# Altium PCB monitor.PcbDoc
Units mm, origin at the board's own origin, x right, y up, seen from the top; angles counter-clockwise.
Board outline 68.83 x 88.9 mm, 2 copper layers (Top Layer, Bottom Layer); 62 components, 47 nets, 260 pads, 53 vias.
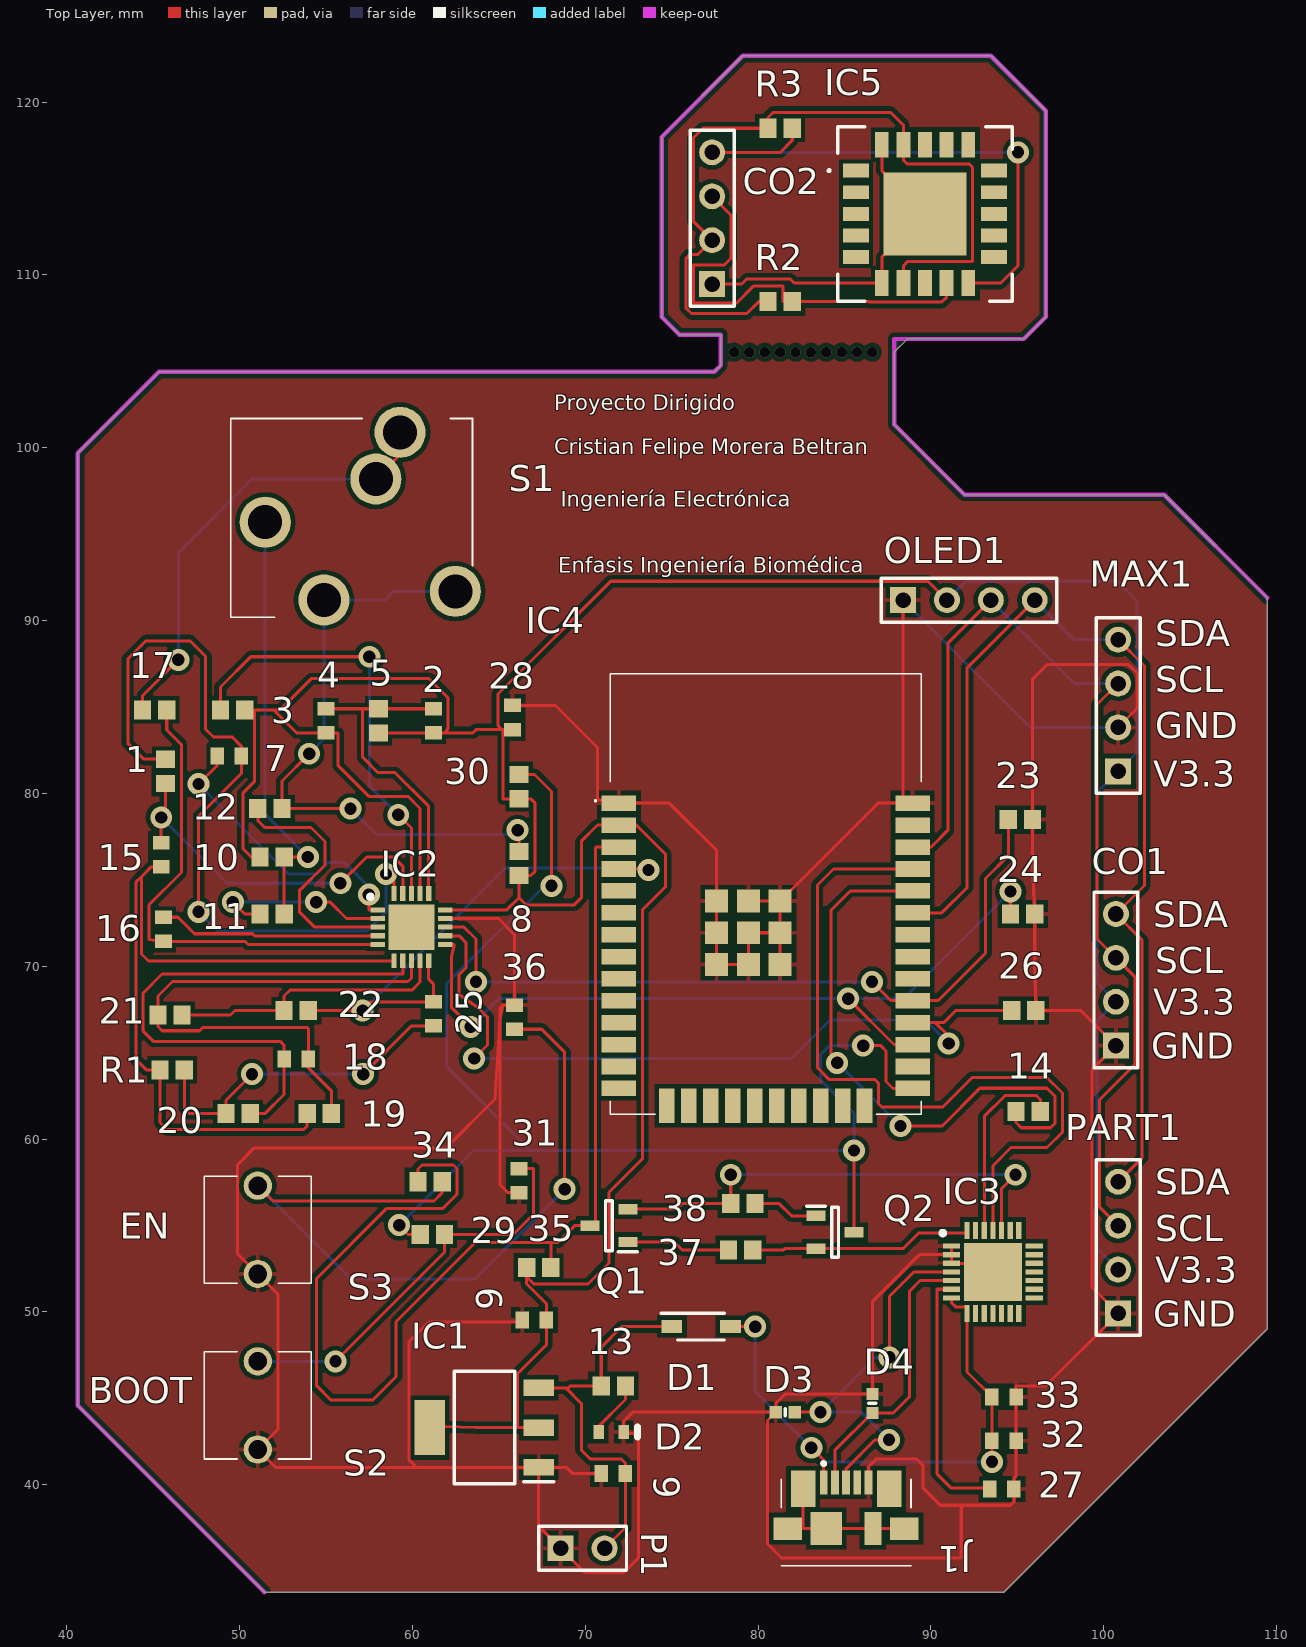
[diagram p0: Top Layer view]
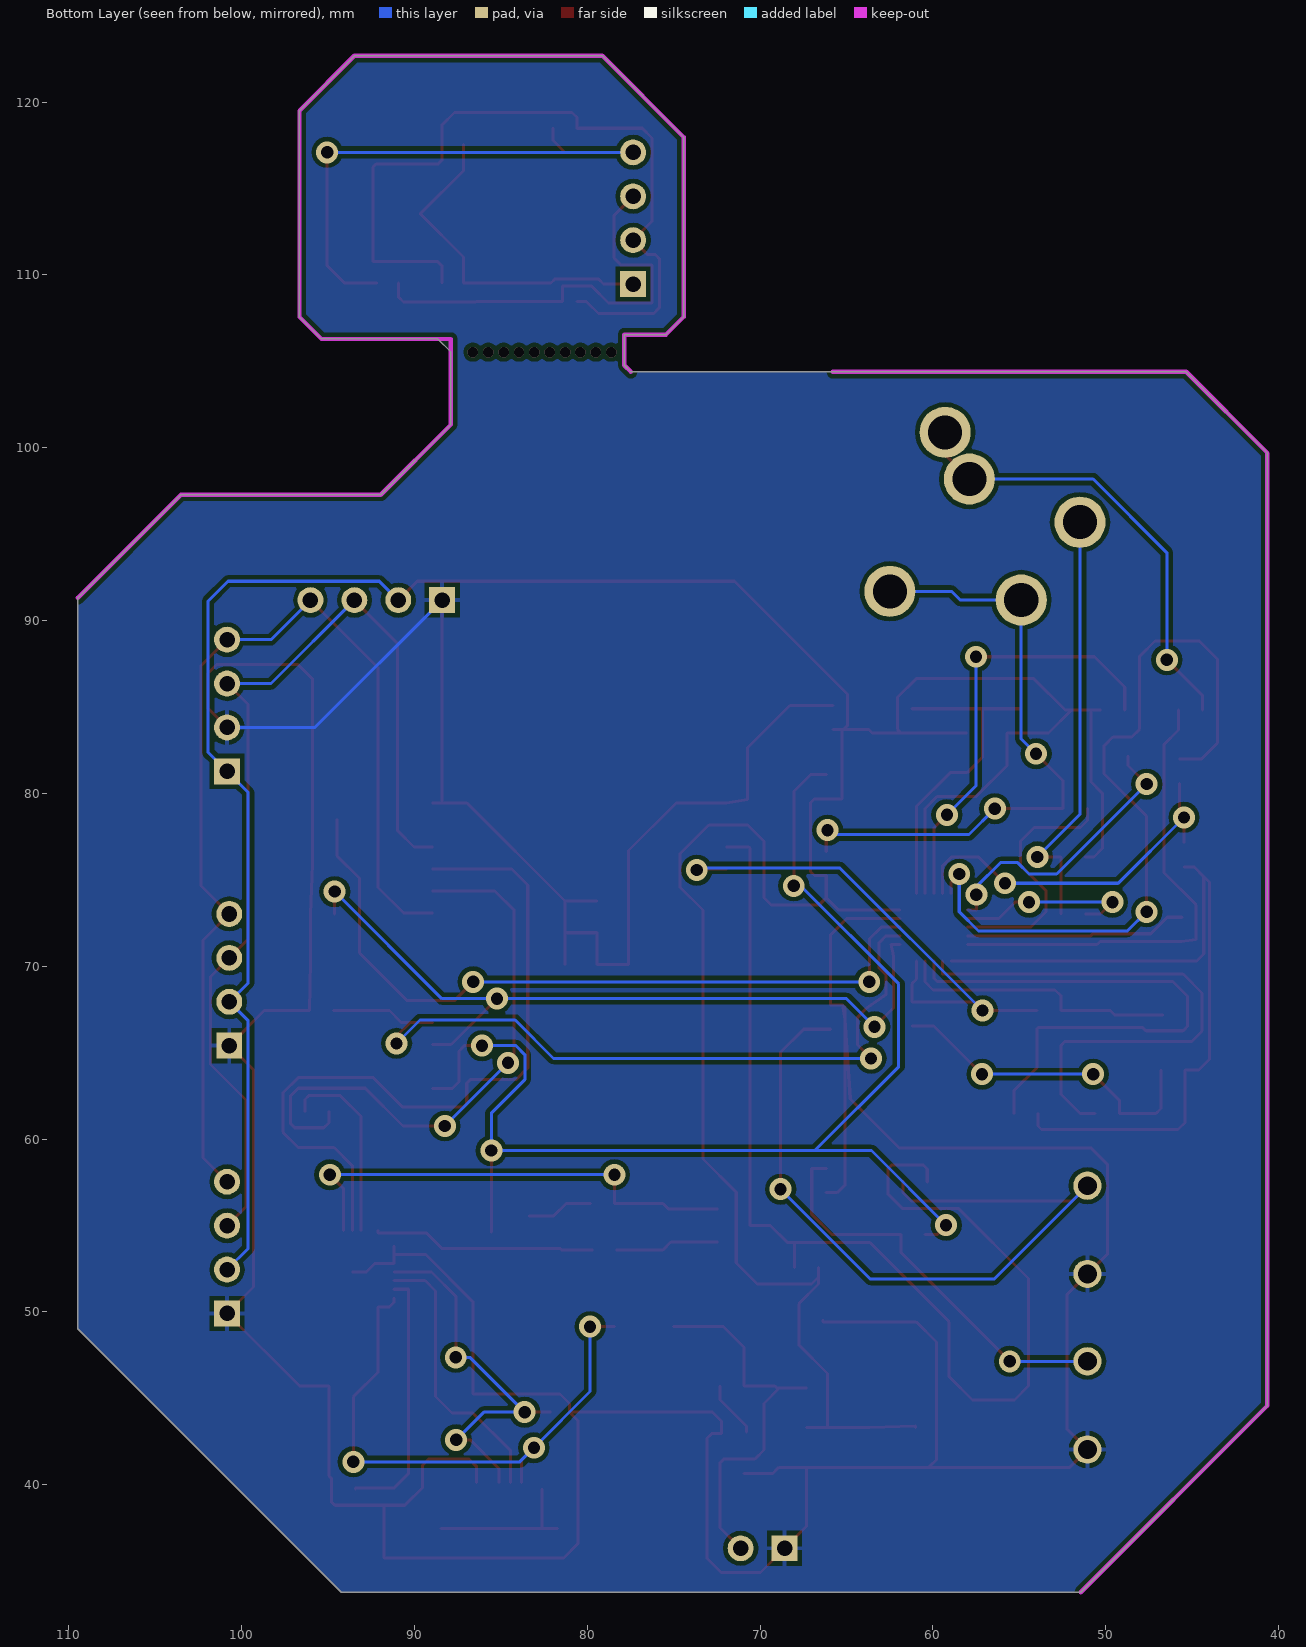
[diagram p1: Bottom Layer view, seen from below]

## Layer stack, top to bottom
Top Solder: solder mask 0.0102, Solder Resist, Dk 3.5
Top Layer: signal copper 0.0356
Dielectric 1: dielectric 0.32, FR-4, Dk 4.8
Bottom Layer: signal copper 0.0356
Bottom Solder: solder mask 0.0102, Solder Resist, Dk 3.5

## Board outline
40.64,44.577 51.435,33.782 94.234,33.782 109.474,49.022 109.474,91.313 103.505,97.282 91.948,97.282 87.884,101.346 87.884,105.537 88.646,106.299 95.377,106.299 96.647,107.569 96.647,119.507 93.472,122.682 79.121,122.682 74.422,117.983 74.422,107.569 75.438,106.553 77.851,106.553 77.851,104.775 77.47,104.394 45.339,104.394 40.64,99.695

## Design rules (kind name [scope] priority, off if disabled: settings)
Clearance [All] p1: gap=0.254 ignorepadtopadclearanceinfootprint=FALSE except(0: Arc-Hole Track-Hole SMDPad-Hole THPad-Hole Via-Hole Fill-Hole Poly-Hole Region-Hole Text-Hole)
PolygonConnect [All] p1: connectstyle=Relief reliefconductorwidth=0.254 reliefentries=4 polygonreliefangle="90 Angle" airgapwidth=0.254
RoutingVias [All] p1: holewidth=0.711 width=1.27 viastyle="Through Hole" minholewidth=0.711 minwidth=1.27 maxholewidth=0.711 maxwidth=1.27
SolderMaskExpansion [All] p1: expansion=0.102 istentingtop=FALSE
Width [All] p1: maxlimit=0.2 minlimit=0.15 preferedwidth=0.175 minimp=50.000000 maximp=50.000000 favimp=50.000000
30 further rules are at their usual default settings.

## Classes and differential pairs
component class micro: 37 38 CO2 IC5
component class alimentacion: 0 1 2 3 4 5 6 7 8 9 10 11 12 13 15 16 17 18 19 20 21 22 23 24 25 26 27 28 29 30 31 32 33 34 35 36 37 38 CO1 D1 D2 D3 D4 IC1 IC2 IC3 IC4 J1 MAX1 OLED1 P1 PART1 Q1 Q2 R1 S1 S2 S3

## Components (designator, comment, footprint, x,y, rotation, side; value= is the part's Value field where it differs from the comment)
1 "ERA3AEB1131V" RESC1608X55X30ML20T20 45.72,81.28 r90 top
2 "C0603C103J5RAC" CAPC1608X87N 61.214,84.201 r90 top
3 "ERA3AEB1131V" RESC1608X55X30ML20T20 49.595,84.836 r180 top
4 "C0603C103J5RAC" CAPC1608X87N 54.991,84.201 r90 top
5 "ERA3AEB1131V" RESC1608X55X30ML20T20 58.039,84.201 r90 top
6 "C0603C103J5RAC" CAPC1608X87N 67.056,49.53 r0 top
7 "C0603C103J5RAC" CAPC1608X87N 49.403,82.169 r180 top
8 "ERA3AEB1131V" RESC1608X55X30ML20T20 66.167,75.946 r90 top
9 "C0603C103J5RAC" CAPC1608X87N 71.628,40.64 r0 top
10 "ERA3AEB1131V" RESC1608X55X30ML20T20 51.881,76.327 r0 top
11 "ERA3AEB1131V" RESC1608X55X30ML20T20 51.878,73.025 r0 top
12 "ERA3AEB1131V" RESC1608X55X30ML20T20 51.754,79.121 r0 top
13 "ERA3AEB1131V" RESC1608X55X30ML20T20 71.628,45.72 r180 top
14 "ERA3AEB1131V" RESC1608X55X30ML20T20 95.631,61.595 r0 top
15 "C0603C103J5RAC" CAPC1608X87N 45.466,76.454 r270 top
16 "C0603C103J5RAC" CAPC1608X87N 45.593,72.136 r270 top
17 "ERA3AEB1131V" RESC1608X55X30ML20T20 45.085,84.836 r0 top
18 "C0603C103J5RAC" CAPC1608X87N 53.275,64.643 r0 top
19 "ERA3AEB1131V" RESC1608X55X30ML20T20 54.61,61.468 r0 top
20 "ERA3AEB1131V" RESC1608X55X30ML20T20 49.911,61.468 r180 top
21 "ERA3AEB1131V" RESC1608X55X30ML20T20 45.974,67.183 r0 top
22 "ERA3AEB1131V" RESC1608X55X30ML20T20 53.275,67.437 r180 top
23 "ERA3AEB1131V" RESC1608X55X30ML20T20 95.185,78.486 r0 top
24 "ERA3AEB1131V" RESC1608X55X30ML20T20 95.312,73.025 r0 top
25 "C0603C103J5RAC" CAPC1608X87N 61.214,67.245 r90 top
26 "ERA3AEB1131V" RESC1608X55X30ML20T20 95.377,67.437 r0 top
27 "C0603C103J5RAC" CAPC1608X87N 94.107,39.751 r0 top
28 "C0603C103J5RAC" CAPC1608X87N 65.786,84.393 r270 top
29 "ERA3AEB1131V" RESC1608X55X30ML20T20 61.152,54.483 r0 top
30 "ERA3AEB1131V" RESC1608X55X30ML20T20 66.167,80.391 r90 top
31 "C0603C103J5RAC" CAPC1608X87N 66.167,57.596 r270 top
32 "C0603C103J5RAC" CAPC1608X87N 94.234,42.545 r0 top
33 "C0603C103J5RAC" CAPC1608X87N 94.234,45.085 r0 top
34 "ERA3AEB1131V" RESC1608X55X30ML20T20 61.022,57.531 r0 top
35 "ERA3AEB1131V" RESC1608X55X30ML20T20 67.31,52.578 r0 top
36 "C0603C103J5RAC" CAPC1608X87N 65.913,67.056 r90 top
37 "ERA3AEB1131V" RESC1608X55X30ML20T20 78.994,53.594 r0 top
38 "ERA3AEB1131V" RESC1608X55X30ML20T20 79.121,56.261 r0 top
CO1 "Header 4" HDR1X4 100.711,65.405 r90 top
CO2 "Header 4" HDR1X4 77.343,109.474 r90 top
D1 "1N5819HWQ-7-F" SOD3716X145N 76.708,49.149 r0 top
D2 "TLMB1100-GS08" VISH-TLMX1100-2_V 71.501,43.053 r0 top
D3 "GG0402050R3C2P" DIONC1006X55N 81.576,44.196 r0 top
D4 "GG0402050R3C2P" DIONC1006X55N 86.614,44.704 r270 top
IC1 "AZ1117IH-3.3TRG1" SOT230P700X180-4N 64.16,43.307 r180 top
IC2 "AD8232ACPZ-WP" QFN50P400X400X80-21N-D 59.944,72.263 r0 top
IC3 "CP2102-GMR" QFN50P500X500X100-29N-D 93.591,52.311 r0 top
IC4 "ESP32-WROOM-32_M103QH2800PH3Q0_" ESP32WROOM32M103QH2800PH3Q0 80.445,74.179 r0 top
IC5 "SCD41-D-R2" SCD41DR2 89.662,113.538 r0 top
J1 "47346-1001" 473461001 85.097,38.221 r0 top
MAX1 "Header 4" HDR1X4 100.838,81.28 r90 top
OLED1 "Header 4" HDR1X4 88.392,91.186 r0 top
P1 "Header 2" HDR1X2 68.58,36.322 r0 top
PART1 "Header 4" HDR1X4 100.838,49.911 r90 top
Q1 "SS8050-G" SOT95P240X115-3N 71.374,54.991 r180 top
Q2 "SS8050-G" SOT95P240X115-3N 84.455,54.61 r0 top
R1 "ERA3AEB1131V" RESC1608X55X30ML20T20 46.101,64.008 r0 top
R2 "ERA3AEB1131V" RESC1608X55X30ML20T20 81.28,108.458 r0 top
R3 "ERA3AEB1131V" RESC1608X55X30ML20T20 81.28,118.491 r0 top
S1 "35RAPC4BH3" 35RAPC4BH3 51.484,95.694 r0 top
S2 "FSM2JRT" FSM2JRT 51.054,42.037 r0 top
S3 "FSM2JRT" FSM2JRT 51.054,52.197 r0 top

## Footprints (in the part's own frame and the unit in brackets; to place one, negate y for a bottom-side part, rotate by r counter-clockwise, add the part's x,y. Pads: shape width x height; smd on the part's side, far side on the other; paste and mask are expansions set on the pad)
35RAPC4BH3 [mm]
  round 2.955 hole 1.97: 1(0,0) 2(7.8,5.2) 3(6.4,2.5) 4(11,-4) 5(3.4,-4.5)
  silkscreen extent -2,-5.5 12,6, body extent -5.34,-5.55 12.16,5.95, height 6.1
473461001 [mm]
  rect 0.45x1.38 smd: 1(-1.3,1.903) 2(-0.65,1.903) 3(0,1.903) 4(0.65,1.903) 5(1.3,1.903)
  rect 1.425x2.1 smd: 6(2.487,1.544) 7(-2.487,1.544)
  rect 1.8x1.9 smd: 8(-1.15,-0.756)
  rect 1x1.9 smd: 9(1.55,-0.756)
  rect 1.65x1.3 smd: 10(-3.375,-0.756) 11(3.375,-0.756)
  silkscreen extent -3.75,-2.91 3.75,3.1, body extent -3.9,-2.85 3.9,2.15, height 2.72
CAPC1608X87N [mm]
  rect 0.78x0.98 smd: 1(-0.7,0) 2(0.7,0)
  body extent -0.87,-0.48 0.88,0.47, height 0.87
DIONC1006X55N [mm]
  rect 0.7x0.7 smd: 1(-0.55,0) 2(0.55,0)
  silkscreen extent 0,-0.2 0,0.2, body extent -0.5,-0.3 0.5,0.3, height 0.55
ESP32WROOM32M103QH2800PH3Q0 [mm]
  rect 2x0.9 smd: 1(-8.5,5.26) 2(-8.5,3.99) 3(-8.5,2.72) 4(-8.5,1.45) 5(-8.5,0.18) 6(-8.5,-1.09) 7(-8.5,-2.36) 8(-8.5,-3.63) 9(-8.5,-4.9) 10(-8.5,-6.17) 11(-8.5,-7.44) 12(-8.5,-8.71) 13(-8.5,-9.98) 14(-8.5,-11.25) 25(8.5,-11.25) 26(8.5,-9.98) 27(8.5,-8.71) 28(8.5,-7.44) 29(8.5,-6.17) 30(8.5,-4.9) 31(8.5,-3.63) 32(8.5,-2.36) 33(8.5,-1.09) 34(8.5,0.18) 35(8.5,1.45) 36(8.5,2.72) 37(8.5,3.99) 38(8.5,5.26)
  rect 0.9x2 smd: 15(-5.715,-12.25) 16(-4.445,-12.25) 17(-3.175,-12.25) 18(-1.905,-12.25) 19(-0.635,-12.25) 20(0.635,-12.25) 21(1.905,-12.25) 22(3.175,-12.25) 23(4.445,-12.25) 24(5.715,-12.25)
  rect 1.33x1.33 smd: 39(-1,-2.24) 40(-2.835,-4.075) 41(-1,-4.075) 42(0.835,-4.075) 43(0.835,-2.24) 44(0.835,-0.405) 45(-1,-0.405) 46(-2.835,-0.405) 47(-2.835,-2.24)
  silkscreen extent -9.9,-12.75 9,12.75, body extent -9,-12.75 9,12.75, height 3.1
FSM2JRT [mm]
  round 1.638 hole 1.092: 1(0,0) 2(0,5.105)
  silkscreen extent -3.1,-0.55 3.1,5.65, body extent -3.1,-0.55 3.1,5.65, height 4.3
HDR1X2 [mm] "Connector; Header; 2 Position"
  rect 1.5x1.5 hole 0.9: 1(0,0)
  round 1.5 hole 0.9: 2(2.54,0)
  silkscreen extent -1.27,-1.27 3.81,1.27
HDR1X4 [mm] "Connector; Header; 4 Position"
  rect 1.5x1.5 hole 0.9: 1(0,0)
  round 1.5 hole 0.9: 2(2.54,0) 3(5.08,0) 4(7.62,0)
  silkscreen extent -1.27,-1.27 8.89,1.27
QFN50P400X400X80-21N-D [mm]
  rect 0.85x0.3 smd: 1(-1.95,1) 2(-1.95,0.5) 3(-1.95,0) 4(-1.95,-0.5) 5(-1.95,-1) 11(1.95,-1) 12(1.95,-0.5) 13(1.95,0) 14(1.95,0.5) 15(1.95,1)
  rect 0.3x0.85 smd: 6(-1,-1.95) 7(-0.5,-1.95) 8(0,-1.95) 9(0.5,-1.95) 10(1,-1.95) 16(1,1.95) 17(0.5,1.95) 18(0,1.95) 19(-0.5,1.95) 20(-1,1.95)
  rect 2.65x2.65 smd: 21(0,0)
  silkscreen extent -2.5,1.63 -2.25,1.87, body extent -2.05,-2.05 2.05,2.05, height 0.8
QFN50P500X500X100-29N-D [mm]
  rect 1x0.3 smd: 1(-2.4,1.5) 2(-2.4,1) 3(-2.4,0.5) 4(-2.4,0) 5(-2.4,-0.5) 6(-2.4,-1) 7(-2.4,-1.5) 15(2.4,-1.5) 16(2.4,-1) 17(2.4,-0.5) 18(2.4,0) 19(2.4,0.5) 20(2.4,1) 21(2.4,1.5)
  rect 0.3x1 smd: 8(-1.5,-2.4) 9(-1,-2.4) 10(-0.5,-2.4) 11(0,-2.4) 12(0.5,-2.4) 13(1,-2.4) 14(1.5,-2.4) 22(1.5,2.4) 23(1,2.4) 24(0.5,2.4) 25(0,2.4) 26(-0.5,2.4) 27(-1,2.4) 28(-1.5,2.4)
  rect 3.35x3.35 smd: 29(0,0)
  silkscreen extent -3.02,2.13 -2.77,2.37, body extent -2.55,-2.55 2.55,2.55, height 1
RESC1608X55X30ML20T20 [mm] "Chip Resistor, 2-Leads, Body 1.60x0.80mm, IPC Low Density"
  rect 1x1.1 smd: 1(-0.7,0) 2(0.7,0)
  body extent -0.9,-0.5 0.9,0.5, height 0.55
SCD41DR2 [mm]
  rect 1.5x0.8 smd: 1(-4,2.5) 2(-4,1.25) 3(-4,0) 4(-4,-1.25) 5(-4,-2.5) 11(4,-2.5) 12(4,-1.25) 13(4,0) 14(4,1.25) 15(4,2.5)
  rect 0.8x1.5 smd: 6(-2.5,-4) 7(-1.25,-4) 8(0,-4) 9(1.25,-4) 10(2.5,-4) 16(2.5,4) 17(1.25,4) 18(0,4) 19(-1.25,4) 20(-2.5,4)
  rect 4.8x4.8 smd: 21(0,0)
  silkscreen extent -5.6,-5.05 5.05,5.05, body extent -5.05,-5.05 5.05,5.05, height 6.31
SOD3716X145N [mm]
  rect 1.2x0.75 smd: 1(-1.7,0) 2(1.7,0)
  silkscreen extent -2.3,-0.78 1.35,0.78, body extent -1.85,-0.77 1.85,0.77, height 1.45
SOT95P240X115-3N [mm]
  rect 1.1x0.6 smd: 1(-1.1,0.95) 2(-1.1,-0.95) 3(1.1,0)
  silkscreen extent -1.65,-1.45 0.2,1.5, body extent -1.2,-1.45 1.2,1.45, height 1.15
SOT230P700X180-4N [mm]
  rect 1.75x0.95 smd: 1(-3.15,2.3) 2(-3.15,0) 3(-3.15,-2.3)
  rect 1.75x3.2 smd: 4(3.15,0)
  silkscreen extent -4.02,-3.25 1.75,3.25, body extent -3.5,-3.25 3.5,3.25, height 1.68
VISH-TLMX1100-2_V [mm] "SMD, 2-Leads, Body 1.6x0.8mm"
  rect 0.6x0.8 smd: 1(-0.725,0) 2(0.725,0)
  silkscreen extent 1.53,-0.3 1.53,0.3, body extent -0.8,-0.4 0.8,0.4, height 0.65

## Part data
1 3 5 8 10 11 12 13 14 17 19 20 21 22 23 24 26 29 30 34 35 37 38 R1 R2 R3: library part CMP-2000-00883-1, Manufacturer=Panasonic, Part Number=ERA3AEB1131V
2 4 6 7 9 15 16 18 25 27 28 31 32 33 36: "Capacitor", Manufacturer_Name=KEMET, Mouser Part Number=80-C0603C103J5RAC, Arrow Part Number=C0603C103J5RAC, Arrow Price/Stock=https://www.arrow.com/en/products/c0603c103j5rac/kemet-corporation?region=nac, Datasheet Link=https://www.kemet.com/specsheet/C0603C103J5RAC%7BBULK%7D, Height=0.87mm, Manufacturer_Part_Number=C0603C103J5RAC, Mouser Price/Stock=https://www.mouser.co.uk/ProductDetail/KEMET/C0603C103J5RAC?qs=Zjfhvh7dXTOjKlZBdCXdvg%3D%3D
CO1 CO2 MAX1 OLED1 PART1: "Header, 4-Pin", LatestRevisionDate=17-Jul-2002, LatestRevisionNote="Re-released for DXP Platform.", Publisher="Altium Limited"
D1: "Schottky Diode", Manufacturer_Name="Diodes Inc.", Mouser Part Number=621-1N5819HWQ-7-F, Arrow Part Number=1N5819HWQ-7-F, Arrow Price/Stock=https://www.arrow.com/en/products/1n5819hwq-7-f/diodes-incorporated?region=nac, Datasheet Link=https://eu.mouser.com/datasheet/2/115/ds30217-1532212.pdf, Height=1.45mm, Manufacturer_Part_Number=1N5819HWQ-7-F, Mouser Price/Stock=https://www.mouser.co.uk/ProductDetail/Diodes-Incorporated/1N5819HWQ-7-F?qs=gZXFycFWdAPDr8BmsK1ygg%3D%3D
D2: library part CMP-1666-00028-1, "Blue LED, 10 mA, 3.9 V, -40 to 100 degC, 2-Pin SMD (0603), RoHS, Tape and Reel", Capacitance="10 nF", Case\Package=Radial, Max Operating Temperature="125 degC", Min Operating Temperature="-55 degC", Package Quantity=500, Tolerance=10%, Type (Capacitors)=X7R, Voltage Rating="100 V", ComponentLink1Description="Manufacturer URL", ComponentLink1URL=http://www.vishay.com/, ComponentLink2Description=Datasheet, ComponentLink2URL=http://download.siliconexpert.com/pdfs/2016/8/7/12/43/26/667/vsh_/manual/379263299541529tlmb1100.pdf, DatasheetVersion="Rev. 2.7, 03/2016", Height="2.54 mm", Lead Pitch="2.54 mm", Length="5.33 mm", Mount="Through Hole", PackageDescription="2-Pin Surface Mount Device, Body 1.6 x 0.8 mm", PackageReference=0603, Packaging=Bulk, Pins=2, Radiation Hardening=No, REACH SVHC="No SVHC", RoHSCompliant=true, Width="3.81 mm"
D3 D4: "TVS Diode (Bi-directional)", Manufacturer_Name=AVX, Mouser Part Number=581-GG0402050R3C2P, Arrow Part Number=GG0402050R3C2P, Arrow Price/Stock=https://www.arrow.com/en/products/gg0402050r3c2p/avx, Datasheet Link=https://mouser.componentsearchengine.com/Datasheets/1/GG0402050R3C2P.pdf, Height=0.55mm, Manufacturer_Part_Number=GG0402050R3C2P, Mouser Price/Stock=https://www.mouser.co.uk/ProductDetail/AVX/GG0402050R3C2P?qs=AQlKX63v8RvR10PwGJX5PQ%3D%3D
IC1: "Integrated Circuit", Manufacturer_Name="Diodes Inc.", Mouser Part Number=621-AZ1117IH-3.3TRG1, Arrow Part Number=AZ1117IH-3.3TRG1, Arrow Price/Stock=https://www.arrow.com/en/products/az1117ih-3.3trg1/diodes-incorporated?region=nac, Datasheet Link=http://www.mouser.com/ds/2/115/AZ1117-776390.pdf, Height=1.8mm, Manufacturer_Part_Number=AZ1117IH-3.3TRG1, Mouser Price/Stock=https://www.mouser.co.uk/ProductDetail/Diodes-Incorporated/AZ1117IH-3.3TRG1?qs=cpo3%2FpBou2jnS4SxLgAVoA%3D%3D
IC2: "Integrated Circuit", Manufacturer_Name="Analog Devices", Mouser Part Number=584-AD8232ACPZ-WP, Arrow Part Number=AD8232ACPZ-WP, Arrow Price/Stock=https://www.arrow.com/en/products/ad8232acpz-wp/analog-devices?region=nac, Datasheet Link=https://datasheet.datasheetarchive.com/originals/distributors/Datasheets-SFU1/DSASFU10003822.pdf, Height=0.8mm, Manufacturer_Part_Number=AD8232ACPZ-WP, Mouser Price/Stock=https://www.mouser.co.uk/ProductDetail/Analog-Devices/AD8232ACPZ-WP?qs=%2FtpEQrCGXCzCRiJ%252BumD7TQ%3D%3D
IC3: "Integrated Circuit", Manufacturer_Name="Silicon Labs", Mouser Part Number=634-CP2102-GMR, Arrow Part Number=CP2102-GMR, Arrow Price/Stock=https://www.arrow.com/en/products/cp2102-gmr/silicon-labs?region=nac, Datasheet Link=https://www.silabs.com/Support%20Documents/TechnicalDocs/CP2102-9.pdf, Height=1mm, Manufacturer_Part_Number=CP2102-GMR, Mouser Price/Stock=https://www.mouser.co.uk/ProductDetail/Silicon-Labs/CP2102-GMR?qs=cNyzPCcHMUWu%2FiPhR8KQAw%3D%3D
IC4: "Integrated Circuit", Manufacturer_Name="Espressif Systems", Manufacturer_Part_Number=ESP32-WROOM-32(M103QH2800PH3Q0), Mouser Part Number=356-ESPWROOM3216MB, Datasheet Link=https://th.mouser.com/datasheet/2/891/esp32-wroom-32_datasheet_en-1510934.pdf, Height=3.2mm, Mouser Price/Stock=https://www.mouser.co.uk/ProductDetail/Espressif-Systems/ESP32-WROOM-32M103QH2800PH3Q0?qs=W%2FMpXkg%252BdQ7IcgHFTTq3Ig%3D%3D
IC5: "Integrated Circuit", Manufacturer_Name=Sensirion, Mouser Part Number=403-SCD41-D-R2, Arrow Part Number=SCD41-D-R2, Arrow Price/Stock=https://www.arrow.com/en/products/scd41-d-r2/sensirion-ag?region=nac, Datasheet Link=https://cz.mouser.com/datasheet/2/682/Sensirion_CO2_Sensors_SCD4x_Datasheet-2010009.pdf, Height=6.8mm, Manufacturer_Part_Number=SCD41-D-R2, Mouser Price/Stock=https://www.mouser.co.uk/ProductDetail/Sensirion/SCD41-D-R2?qs=HBWAp0VN4Ri4o7ei4T3s0g%3D%3D
J1: "Connector", Manufacturer_Name=Molex, Mouser Part Number=538-47346-1001, Arrow Part Number=47346-1001, Arrow Price/Stock=https://www.arrow.com/en/products/47346-1001/molex?region=nac, Datasheet Link=http://www.molex.com/webdocs/datasheets/pdf/en-us/0473461001_IO_CONNECTORS.pdf, Height=2.94mm, Manufacturer_Part_Number=47346-1001, Mouser Price/Stock=https://www.mouser.co.uk/ProductDetail/Molex/47346-1001?qs=yd8XiKYcH9muPqUKe4E0Dw%3D%3D
P1: "Header, 2-Pin", LatestRevisionDate=17-Jul-2002, LatestRevisionNote="Re-released for DXP Platform.", Publisher="Altium Limited"
Q1 Q2: "Transistor BJT NPN", Manufacturer_Name="Comchip Technology", Mouser Part Number=750-SS8050-G, Arrow Part Number=SS8050-G, Arrow Price/Stock=https://www.arrow.com/en/products/ss8050-g/comchip-technology?region=nac, Datasheet Link=https://datasheet.datasheetarchive.com/originals/distributors/DKDS-12/229454.pdf, Height=1.15mm, Manufacturer_Part_Number=SS8050-G, Mouser Price/Stock=https://www.mouser.co.uk/ProductDetail/Comchip-Technology/SS8050-G?qs=LLUE9lz1YbcHg%252BWLMAtcrQ%3D%3D
S1: "Switch", Manufacturer_Name=Switchcraft, Mouser Part Number=502-35RAPC4BH3, Arrow Part Number=35RAPC4BH3, Arrow Price/Stock=https://www.arrow.com/en/products/35rapc4bh3/switchcraft, Datasheet Link=http://www.switchcraft.com/Drawings/35rapc__h3_cd.pdf, Height=6mm, Manufacturer_Part_Number=35RAPC4BH3, Mouser Price/Stock=https://www.mouser.co.uk/ProductDetail/Switchcraft/35RAPC4BH3?qs=I3kMT7EEIOWFGyk5rynRAQ%3D%3D
S2 S3: "Switch (2-Pin Push)", Manufacturer_Name="TE Connectivity", Mouser Part Number=506-FSM2JRT, Arrow Part Number=FSM2JRT, Arrow Price/Stock=https://www.arrow.com/en/products/fsm2jrt/te-connectivity?region=nac, Datasheet Link=http://www.farnell.com/datasheets/2074947.pdf, Height=4.3mm, Manufacturer_Part_Number=FSM2JRT, Mouser Price/Stock=https://www.mouser.co.uk/ProductDetail/TE-Connectivity-PB/FSM2JRT?qs=g%252BEszo6zu8OVk6hda53nSw%3D%3D

## Via types
v1: diameter 1.27, hole 0.711, Top Layer to Bottom Layer, 43 vias
v2: diameter 0.6, hole 0.6, Top Layer to Bottom Layer, 10 vias

## Nets (pads, with @x,y where several pads share a name; then routed paths per layer and width w, separated by ;. In a path a pad name is that pad's centre, name@x,y a point inside that pad or via, vN(x,y) a via of type N, cw(c..) or ccw(c..) an arc to the next point about the centre after c; other vN are vias at no path point)
DTR: 37.2 IC3.28 Q2.2 | length 12.9
  Top Layer w0.175: 37.2 81.483,53.594 81.549,53.66 Q2.2 88.392,53.66 89.291,54.559 92.091,54.559 IC3.28
EN: 34.1 35.2 IC4.3 Q1.3 | length 68.2
  Top Layer w0.175: 34.1 60.322,58.265 60.554,58.496 62.382,58.496 62.586,58.293 62.586,56.806 61.773,55.993 58.522,55.993 54.458,51.929 54.458,45.72 55.27,44.907 57.709,44.907 59.055,46.253 59.055,49.428 63.652,54.026 68.01,54.026 ; 35.2 68.01,54.026 ; IC4.3 70.636,76.899 70.587,76.85 70.587,54.991 Q1.3 69.393,54.991 68.428,54.026 68.01,54.026
Gnd: 6.1 9.1 23.2 24.2 26.2 27.2 28.1 31.2 32.2 33.2 36.2 CO1.1 D2.2 D3.1 D4.1 IC1.1 IC2.14 IC3.1 IC3.2 IC3.3 IC3.29 IC4.1 IC4.38 IC4.39 IC4.40 IC4.41 IC4.42 IC4.43 IC4.44 IC4.45 IC4.46 IC4.47 J1.5 MAX1.2 OLED1.1 P1.1 PART1.1 S2.1 S3.1 | length 316.7
  Top Layer w0.175: IC2.14 64.981,72.763 65.913,71.831 36.2 65.236,67.756 ; 28.1 68.275,85.093 70.714,82.655 70.714,79.642 IC4.1 74.866,79.439 77.61,76.695 IC4.46 IC4.47 IC4.40 IC4.41 IC4.39 IC4.43 ; 31.2 65.532,56.896 65.075,57.353 65.075,66.94 ; 6.1 66.356,49.428 60.96,49.428 59.792,48.26 59.792,41.453 60.237,41.007 ; 9.1 69.277,40.64 68.91,41.007 IC1.1 ; IC4.45 IC4.44 ; IC4.42 IC4.43 ; J1.5 86.397,41.046 86.84,41.49 89.168,41.49 89.535,41.123 89.535,39.827 90.551,38.811 91.759,38.811 ; OLED1.1 IC4.38@88.392,79.439 ; IC4.38 IC4.38@88.392,79.439 ; IC3.1 IC3.2 ; IC3.29 92.778,52.311 92.278,52.811 IC3.3 IC3.2 ; MAX1.2 101.93,84.912 101.93,86.97 101.447,87.452 96.723,87.452 95.885,86.614 23.2 95.885,75.895 24.2 96.012,70.296 26.2 98.679,67.437 CO1.1 99.314,64.008 99.314,51.435 PART1.1 96.636,45.709 94.934,45.709 33.2 32.2 94.934,40.494 94.807,40.367 27.2 94.807,39.014 94.604,38.811 91.759,38.811 ; 60.237,41.007 52.084,41.007 S2.1 52.222,43.205 52.222,51.029 S3.1 49.886,53.365 49.886,58.522 50.856,59.492 61.956,59.492 64.779,62.315 65.075,66.94 ; 60.237,41.007 IC1.1 ; 65.075,66.94 65.075,67.595 65.236,67.756 ; 65.075,66.94 65.236,67.756 ; IC1.1 67.31,37.592 P1.1 69.977,34.925 72.238,34.925 73.076,35.763 73.076,42.672 72.796,42.951 72.226,42.951 D2.2 72.226,43.676 72.746,44.196 D3.1 ; D3.1 80.543,43.713 80.543,36.576 81.356,35.763 91.759,35.763 91.759,38.811 ; D3.1 81.026,44.704 81.576,45.254 D4.1 86.614,50.593 89.332,53.311 IC3.2 ; IC4.43 IC4.44 ; IC4.44 86.945,79.439 IC4.38@88.392,79.439
  Bottom Layer w0.175: OLED1.1 95.758,83.82 MAX1.2
IO0: 29.1 30.2 IC4.25 Q2.3 | length 76.1
  Top Layer w0.175: v1(59.233,55.016) 59.233,54.991 59.741,54.483 29.1 ; 30.2 67.067,81.091 68.047,80.112 v1(68.047,74.651) ; v1(85.547,59.334) 85.547,54.61 Q2.3 ; v1(86.086,65.402) 87.108,65.402 87.41,65.1 87.41,63.327 87.808,62.929 IC4.25
  Bottom Layer w0.175: v1(59.233,55.016) 63.551,59.334 66.827,59.334 ; v1(68.047,74.651) 67.64,74.651 61.976,68.986 61.976,64.186 66.827,59.334 ; v1(86.086,65.402) 84.125,65.402 83.605,64.883 83.605,63.438 85.547,61.496 v1(85.547,59.334) 66.827,59.334
IO5: 23.1 IC2.13 IC4.29 | length 43.9
  Top Layer w0.175: IC2.13 62.992,72.263 63.678,71.577 v1(63.678,69.099) ; v1(86.6,69.099) 87.69,68.009 IC4.29 90.419,68.009 93.167,70.757 93.167,75.082 94.485,76.4 23.1
  Bottom Layer w0.175: v1(63.678,69.099) v1(86.6,69.099)
IO16: 24.1 IC2.11 IC4.27 | length 46.4
  Top Layer w0.175: IC2.11 62.417,71.263 62.394,71.155 62.272,70.595 62.272,67.598 v1(63.373,66.497) ; v1(85.217,68.123) 87.871,65.469 IC4.27 ; 24.1 v1(94.612,74.32)
  Bottom Layer w0.175: v1(63.373,66.497) 64.999,68.123 v1(85.217,68.123) 88.414,68.123 v1(94.612,74.32)
IO17: 26.1 IC2.12 IC4.28 | length 45.9
  Top Layer w0.175: IC2.12 62.713,71.763 63.108,71.368 63.108,69.912 62.701,69.506 62.701,68.365 63.822,67.583 64.35,67.056 64.35,65.442 v1(63.576,64.668) ; IC4.28 90.258,66.739 ; v1(91.034,65.532) 91.034,65.964 90.258,66.739 ; 26.1 91.44,67.437 90.742,66.739 90.258,66.739
  Bottom Layer w0.175: v1(63.576,64.668) 81.943,64.668 84.164,66.89 89.676,66.89 v1(91.034,65.532)
Net1_1: 1.1 15.1 IC2.19 | length 21.5
  Top Layer w0.175: 15.1 v1(45.466,78.613) 45.466,78.74 45.72,78.994 1.1 ; v1(55.829,74.803) 57.339,76.313 58.928,76.313 59.447,75.794 59.447,74.846 59.444,74.842 IC2.19
  Bottom Layer w0.175: v1(45.466,78.613) 49.276,74.803 v1(55.829,74.803)
Net1_2: 1.2 7.1 IC2.20 | length 45.3
  Top Layer w0.175: 1.2 44.461,81.98 43.536,82.906 43.536,87.782 44.577,88.824 47.142,88.824 48.031,87.935 48.031,83.718 48.489,83.261 49.581,83.261 50.103,82.739 7.1 50.103,81.153 47.625,78.675 v1(47.625,73.152) ; v1(58.471,75.336) 58.944,74.863 IC2.20
  Bottom Layer w0.175: v1(47.625,73.152) 48.743,72.034 57.353,72.034 58.471,73.152 v1(58.471,75.336)
Net2_2: 2.2 4.2 5.2 IC2.16 | length 19.1
  Top Layer w0.175: 4.2 57.125,84.901 ; IC2.16 60.944,79.256 58.996,81.204 58.014,81.204 57.125,82.093 57.125,84.901 ; 2.2 5.2 57.125,84.901
Net3_2: 3.2 IC2.18 | length 25.4
  Top Layer w0.175: 3.2 48.895,86.157 50.648,87.909 v1(57.506,87.909) ; v1(59.182,78.765) 59.944,78.003 IC2.18
  Bottom Layer w0.175: v1(57.506,87.909) 57.506,80.442 v1(59.182,78.765)
Net7_2: 7.2 IC2.1 | length 16.8
  Top Layer w0.175: v1(47.625,80.543) 48.703,81.621 7.2 ; v1(57.48,74.143) 57.48,73.263 IC2.1
  Bottom Layer w0.175: v1(47.625,80.543) 52.832,75.336 54.432,75.336 55.093,75.997 56.083,75.997 57.48,74.6 v1(57.48,74.143)
Net8_2: 8.2 12.2 S1.4 S1.5 | length 36.5
  Top Layer w0.175: v1(54.026,82.296) 52.454,80.724 12.2 v1(56.413,79.121) ; v1(66.091,77.876) 66.167,77.8 8.2
  Bottom Layer w0.175: v1(54.026,82.296) 54.884,83.154 S1.5 58.42,91.194 58.92,91.694 S1.4 ; v1(56.413,79.121) 57.912,77.622 65.837,77.622 v1(66.091,77.876)
Net10_2: 10.2 11.2 S1.1 | length 25.1
  Top Layer w0.175: 11.2 52.578,74.651 52.581,74.654 10.2 v1(53.95,76.327)
  Bottom Layer w0.175: S1.1 51.484,78.793 v1(53.95,76.327)
Net11_1: 11.1 IC2.2 | length 10.6
  Top Layer w0.175: v1(49.606,73.711) 50.292,73.025 11.1 ; v1(54.432,73.711) 55.245,73.711 56.193,72.763 IC2.2
  Bottom Layer w0.175: v1(49.606,73.711) v1(54.432,73.711)
Net12_1: 12.1 IC2.3 | length 14.7
  Top Layer w0.175: 12.1 51.054,78.435 51.46,78.029 54.127,78.029 54.94,77.216 54.94,75.856 53.456,74.371 53.456,73.152 54.345,72.263 IC2.3
Net13_1: 13.1 D2.1 | length 3.3
  Top Layer w0.175: D2.1 70.776,43.383 72.328,44.935 13.1
Net14_2: 14.2 IC3.26 | length 11.1
  Top Layer w0.175: IC3.26 93.091,61.316 94.285,62.509 96.114,62.509 96.331,62.292 14.2
Net15_2: 15.2 19.1 IC2.6 R1.1 | length 45.5
  Top Layer w0.175: 15.2 44.893,75.754 44.323,75.184 ; 19.1 53.91,60.757 53.707,60.554 45.807,60.554 45.401,60.96 R1.1 44.602,64.008 43.993,64.618 43.993,74.854 44.323,75.184 ; IC2.6 58.944,70.307 44.729,70.307 44.323,70.714 44.323,75.184
Net16_1: 16.1 IC2.4 | length 12.8
  Top Layer w0.175: 16.1 46.431,72.836 47.385,71.882 50.749,71.882 50.868,71.763 IC2.4
Net16_2: 16.2 17.2 IC2.5 | length 27.7
  Top Layer w0.175: 17.2 45.785,83.668 46.634,82.818 46.634,75.431 44.761,73.558 44.761,71.556 16.2 50.32,71.436 50.493,71.263 IC2.5
Net17_1: 17.1 S1.2 S1.3 | length 26.4
  Top Layer w0.175: 17.1 44.385,85.66 v1(46.457,87.732) ; S1.3 59.284,99.594 S1.2
  Bottom Layer w0.175: v1(46.457,87.732) 46.457,93.929 50.721,98.194 S1.3
Net18_1: 18.1 20.1 IC2.7 | length 32.2
  Top Layer w0.175: 20.1 51.457,61.468 52.575,62.586 18.1 52.575,65.43 52.346,65.659 45.009,65.659 44.425,66.243 44.425,68.454 45.517,69.546 59.444,69.546 IC2.7
Net18_2: 18.2 19.2 21.1 IC2.8 | length 32.2
  Top Layer w0.175: 19.2 55.31,62.8 53.975,64.135 18.2 53.975,66.396 53.924,66.446 47.854,66.446 47.676,66.269 45.517,66.269 45.274,66.511 21.1 45.274,68.275 46.116,69.117 59.741,69.117 59.944,69.321 IC2.8
Net20_2: 20.2 25.1 R1.2 | length 19.3
  Top Layer w0.175: R1.2 46.801,61.773 47.106,61.468 20.2 49.211,62.241 v1(50.724,63.754) ; v1(57.15,63.754) 59.941,66.545 25.1
  Bottom Layer w0.175: v1(50.724,63.754) v1(57.15,63.754)
Net21_2: 21.2 22.2 IC2.9 | length 16.3
  Top Layer w0.175: 21.2 49.479,67.183 49.733,67.437 22.2 52.575,68.275 52.931,68.631 59.987,68.631 60.444,69.088 IC2.9
Net27_1: 27.1 IC3.6 | length 15
  Top Layer w0.175: IC3.6 90.348,51.311 90.348,40.64 91.186,39.802 93.407,39.802 27.1
Net29_2: 29.2 31.1 S2.2 | length 23.6
  Top Layer w0.175: v1(55.549,47.142) 61.852,53.445 29.2 65.837,54.483 67.005,55.651 67.005,58.296 31.1
  Bottom Layer w0.175: S2.2 v1(55.549,47.142)
Net34_2: 34.2 36.1 S3.2 | length 45.4
  Top Layer w0.175: S3.2 51.934,56.422 61.248,56.422 61.722,56.896 34.2 ; 36.1 67.477,66.356 68.809,65.024 v1(68.809,57.099)
  Bottom Layer w0.175: S3.2 56.464,51.892 63.602,51.892 v1(68.809,57.099)
Net37_1: 37.1 Q1.1 | length 6
  Top Layer w0.175: Q1.1 75.159,54.041 75.606,53.594 37.1
Net38_2: 38.2 Q2.1 | length 3.8
  Top Layer w0.175: 38.2 81.229,56.261 81.93,55.56 Q2.1
NetCO2_1: CO2.1 IC5.6 IC5.20 IC5.21 | length 20.1
  Top Layer w0.175: CO2.1 79.055,109.474 79.36,109.779 81.851,109.779 82.091,109.538 IC5.6 87.162,111.038 IC5.21 87.162,116.038 IC5.20
NetCO2_2: CO2.2 IC5.7 IC5.19 R2.1 R3.1 | length 46.5
  Top Layer w0.175: R2.1 80.035,108.458 79.35,107.772 76.153,107.772 75.822,108.102 75.822,110.947 76.048,111.173 76.502,111.173 CO2.2 76.251,113.106 76.251,117.932 76.81,118.491 R3.1 80.58,119.112 80.874,119.405 87.675,119.405 88.412,118.669 IC5.19 88.412,116.637 88.615,116.434 92.202,116.434 92.405,116.23 92.405,110.769 88.641,110.769 88.412,110.541 IC5.7
NetCO2_3: CO2.3 IC5.9 R2.2 | length 25.5
  Top Layer w0.175: CO2.3 78.435,113.462 78.435,110.973 78.029,110.566 76.251,110.566 76.251,108.382 78.764,108.382 79.731,109.35 81.432,109.35 81.432,108.458 R2.2 86.411,108.458 86.436,108.433 90.633,108.433 90.912,108.712 IC5.9
NetCO2_4: CO2.4 IC5.10 R3.2 | length 33.2
  Top Layer w0.175: CO2.4 81.28,117.094 81.98,117.794 R3.2 ; IC5.10 92.162,109.525 94.031,109.525 95.047,110.541 v1(95.047,117.094)
  Bottom Layer w0.175: CO2.4 v1(95.047,117.094)
NetJ1_7: J1.7 J1.8 J1.9 J1.10 J1.11 | length 9.1
  Top Layer w0.175: J1.10 82.61,37.465 ; J1.7 82.61,37.465 ; J1.11 J1.9 J1.8 82.61,37.465
OUT_M: 22.1 25.2 IC2.10 IC4.4 | length 31.7
  Top Layer w0.175: 22.1 v1@57.074,67.437 ; v1(57.125,67.437) v1@57.074,67.437 ; IC2.10 60.944,69.256 61.214,68.986 25.2 57.582,67.945 v1@57.074,67.437 ; IC4.4 73.596,75.629 v1(73.66,75.565)
  Bottom Layer w0.175: v1(57.125,67.437) 65.38,75.692 73.533,75.692 v1(73.66,75.565)
RTS: 38.1 IC3.24 Q1.2 | length 27.8
  Top Layer w0.175: Q1.2 75.286,55.941 75.606,56.261 38.1 v1(78.421,57.937) ; IC3.24 94.091,57.134 v1(94.894,57.937)
  Bottom Layer w0.175: v1(78.421,57.937) v1(94.894,57.937)
RXD0: 14.1 IC4.34 | length 34.1
  Top Layer w0.175: v1(84.582,64.414) 84.226,64.77 84.226,73.241 85.344,74.359 IC4.34 ; v1(88.24,60.757) 90.653,60.757 92.837,62.941 96.723,62.941 97.18,62.484 97.18,60.909 96.926,60.655 95.236,60.655 94.931,60.96 14.1
  Bottom Layer w0.175: v1(84.582,64.414) v1(88.24,60.757)
SCL_CO2: CO1.3 IC4.36 MAX1.3 OLED1.3 PART1.3 | length 60.2
  Top Layer w0.175: IC4.36 90.018,76.899 90.983,77.864 90.983,88.697 OLED1.3 ; PART1.3 99.746,56.083 99.746,62.256 101.803,64.313 101.803,69.393 CO1.3 99.619,71.577 99.619,85.141 MAX1.3
  Bottom Layer w0.175: OLED1.3 98.298,86.36 MAX1.3
SDA_CO2: CO1.4 IC4.33 MAX1.4 OLED1.4 PART1.4 | length 61.7
  Top Layer w0.175: IC4.33 90.627,73.089 92.1,74.562 92.1,87.274 OLED1.4 ; PART1.4 102.232,58.925 102.232,71.504 CO1.4 102.359,74.673 102.359,87.379 MAX1.4
  Bottom Layer w0.175: OLED1.4 98.298,88.9 MAX1.4
TXD0: IC3.25 IC4.35 | length 44.2
  Top Layer w0.175: IC4.35 84.367,75.629 83.439,74.701 83.439,64.124 84.125,63.438 86.766,63.438 86.97,63.235 86.97,62.052 87.173,61.849 90.678,61.849 92.38,63.551 96.723,63.551 97.612,62.662 97.612,60.401 96.723,59.512 94.64,59.512 93.591,58.463 IC3.25
USB_DN: D4.2 IC3.5 J1.2 | length 16.2
  Top Layer w0.175: J1.2 84.447,41.987 D4.2 87.817,44.154 88.773,45.11 88.773,51.206 89.378,51.811 IC3.5
USB_DP: D3.2 IC3.4 J1.3 | length 23.1
  Top Layer w0.175: D3.2 v1(83.617,44.196) ; J1.3 85.097,40.926 86.766,42.596 v1(87.579,42.596) ; v1(87.605,47.371) 87.605,50.902 89.014,52.311 IC3.4
  Bottom Layer w0.175: v1(87.579,42.596) 85.979,44.196 v1(83.617,44.196) 86.792,47.371 v1(87.605,47.371)
V3.3: 2.1 3.1 4.1 5.1 6.2 8.1 10.1 28.2 30.1 35.1 CO1.2 IC1.2 IC1.4 IC2.15 IC2.17 IC4.2 MAX1.1 OLED1.2 PART1.2 | length 210.7
  Top Layer w0.175: 3.1 50.851,84.836 ; 10.1 50.673,76.327 50.19,76.81 50.19,80.01 50.851,80.67 50.851,84.836 ; 5.1 2.1 61.835,83.501 ; IC2.17 60.444,79.129 59.741,79.832 57.48,79.832 55.702,81.61 55.702,83.501 4.1 53.303,83.501 51.968,84.836 ; IC1.4 61.01,43.398 61.013,43.398 63.662,43.307 66.091,43.307 ; IC2.15 65.465,73.263 66.167,73.965 ; 28.2 65.253,83.693 ; 35.1 66.61,52.019 ; IC1.2 66.091,43.307 ; OLED1.2 89.84,92.278 71.476,92.278 64.948,85.75 64.948,83.922 65.176,83.693 ; 50.851,84.836 51.968,84.836 ; 51.968,84.836 52.349,84.836 54.153,86.639 60.96,86.639 62.052,85.547 62.052,83.718 61.835,83.501 ; 61.835,83.501 63.5,83.501 63.692,83.693 65.176,83.693 ; 65.176,83.693 65.253,83.693 ; 65.253,83.693 65.253,79.691 30.1 66.853,79.691 67.081,79.462 67.081,75.475 66.853,75.246 8.1 66.167,73.965 ; 66.091,43.307 66.091,46.431 67.756,48.096 6.2 67.756,50.47 66.61,51.616 66.61,52.019 ; 66.167,73.965 66.573,73.558 69.367,73.558 69.774,73.965 69.774,77.229 70.714,78.169 IC4.2 72.961,78.169 74.637,76.493 74.637,74.583 73.304,73.251 73.304,58.852 71.374,56.921 71.374,52.832 70.155,51.613 67.016,51.613 66.61,52.019
  Bottom Layer w0.175: OLED1.2 92.024,92.278 100.787,92.278 101.93,91.135 101.93,82.372 MAX1.1 99.619,80.061 99.619,69.037 CO1.2 99.619,66.853 99.619,53.67 PART1.2
VDDUSB: 32.1 33.1 D1.2 IC3.7 IC3.8 J1.1 | length 33.7
  Top Layer w0.175: D1.2 v1(79.832,49.149) ; v1(83.083,42.139) 83.797,41.425 J1.1 ; IC3.7 91.186,50.811 91.186,50.546 91.44,50.292 92.091,50.292 IC3.8 92.091,46.528 33.1 93.534,43.79 32.1 v1(93.534,41.326)
  Bottom Layer w0.175: v1(79.832,49.149) 79.832,45.39 v1(83.083,42.139) 83.896,41.326 v1(93.534,41.326)
Vin: 9.2 13.2 D1.1 IC1.3 P1.2 | length 22.7
  Top Layer w0.175: IC1.3 68.871,45.607 ; P1.2 72.328,37.53 9.2 72.328,41.25 72.099,41.478 70.307,41.478 69.774,42.012 69.774,44.704 68.871,45.607 ; D1.1 72.122,49.149 70.928,47.955 13.2 69.15,45.72 69.037,45.607 68.871,45.607
pads on no net: IC2.21 IC3.9 IC3.10 IC3.11 IC3.12 IC3.13 IC3.14 IC3.15 IC3.16 IC3.17 IC3.18 IC3.19 IC3.20 IC3.21 IC3.22 IC3.23 IC3.27 IC4.5 IC4.6 IC4.7 IC4.8 IC4.9 IC4.10 IC4.11 IC4.12 IC4.13 IC4.14 IC4.15 IC4.16 IC4.17 IC4.18 IC4.19 IC4.20 IC4.21 IC4.22 IC4.23 IC4.24 IC4.26 IC4.30 IC4.31 IC4.32 IC4.37 IC5.1 IC5.2 IC5.3 IC5.4 IC5.5 IC5.8 IC5.11 IC5.12 IC5.13 IC5.14 IC5.15 IC5.16 IC5.17 IC5.18 J1.4 J1.6
copper on no net:
  other v2: 78.613,105.537 79.502,105.537 80.391,105.537 81.28,105.537 82.169,105.537 83.058,105.537 83.947,105.537 84.836,105.537 85.725,105.537 86.614,105.537

## Polygon pours and split planes (outlines as drawn)
Gnd on Bottom Layer "GND_L02_P001" (solid, pour order 1): 40.64,44.577 51.435,33.782 94.234,33.782 109.474,49.022 109.474,91.313 103.505,97.282 91.948,97.282 87.884,101.346 87.884,105.537 88.646,106.299 95.377,106.299 96.647,107.569 96.647,119.507 93.472,122.682 79.121,122.682 74.422,117.983 74.422,107.569 75.438,106.553 77.851,106.553 77.851,104.775 77.47,104.394 45.339,104.394 40.64,99.695
Gnd on Top Layer "GND_L01_P000" (solid, pour order 0): 40.64,44.577 51.435,33.782 94.234,33.782 109.474,49.022 109.474,91.313 103.505,97.282 91.948,97.282 87.884,101.346 87.884,105.537 88.646,106.299 95.377,106.299 96.647,107.569 96.647,119.507 93.472,122.682 79.121,122.682 74.422,117.983 74.422,107.569 75.438,106.553 77.851,106.553 77.851,104.775 77.47,104.394 45.339,104.394 40.64,99.695

## Keep-outs
Top Layer:
  lines w0.254: 65.786,104.394 77.47,104.394
Keep-Out Layer:
  lines w0.254: 51.435,33.782 40.64,44.577 40.64,99.695 45.339,104.394 65.786,104.394 ; 77.47,104.394 77.851,104.775 77.851,106.553 75.438,106.553 74.422,107.569 74.422,108.839 74.422,117.983 79.121,122.682 93.472,122.682 96.647,119.507 96.647,107.569 95.377,106.299 87.884,106.299 87.884,101.346 91.948,97.282 103.505,97.282 109.474,91.313

## Silkscreen, mask and mechanical layers (free items; w line width, h text height)
Top Overlay:
  text "Proyecto Dirigido" at 68.199,101.854 h1.52
  text "Cristian Felipe Morera Beltran" at 68.199,99.314 h1.52
  text "Ingeniería Electrónica" at 68.58,96.266 h1.52
  text "Enfasis Ingeniería Biomédica" at 68.453,92.456 h1.52
  text "SDA" at 102.997,88.519 h1.52
  text "SCL" at 102.997,85.852 h1.52
  text "GND" at 102.997,83.185 h1.52
  text "V3.3" at 102.87,80.391 h1.52
  text "SDA" at 102.87,72.263 h1.52
  text "SCL" at 102.997,69.596 h1.52
  text "V3.3" at 102.87,67.183 h1.52
  text "GND" at 102.743,64.643 h1.52
  text "SDA" at 102.997,56.769 h1.52
  text "EN" at 43.053,54.229 h1.52
  text "SCL" at 102.997,54.102 h1.52
  text "V3.3" at 102.997,51.689 h1.52
  text "GND" at 102.87,49.149 h1.52
  text "BOOT" at 41.275,44.704 h1.52
Mechanical 1:
  lines w0.254: 40.64,44.577 40.64,99.695 45.339,104.394 65.786,104.394 77.47,104.394 77.851,104.775 77.851,106.553 75.438,106.553 74.422,107.569 74.422,117.983 79.121,122.682 93.472,122.682 96.647,119.507 96.647,107.569 95.377,106.299 88.646,106.299 87.884,105.537 87.884,101.346 91.948,97.282 103.505,97.282 109.474,91.313 109.474,49.022 94.234,33.782 51.435,33.782 40.64,44.577